# EAGLE board source_eagle (EAGLE 9.6.2)
REV: D
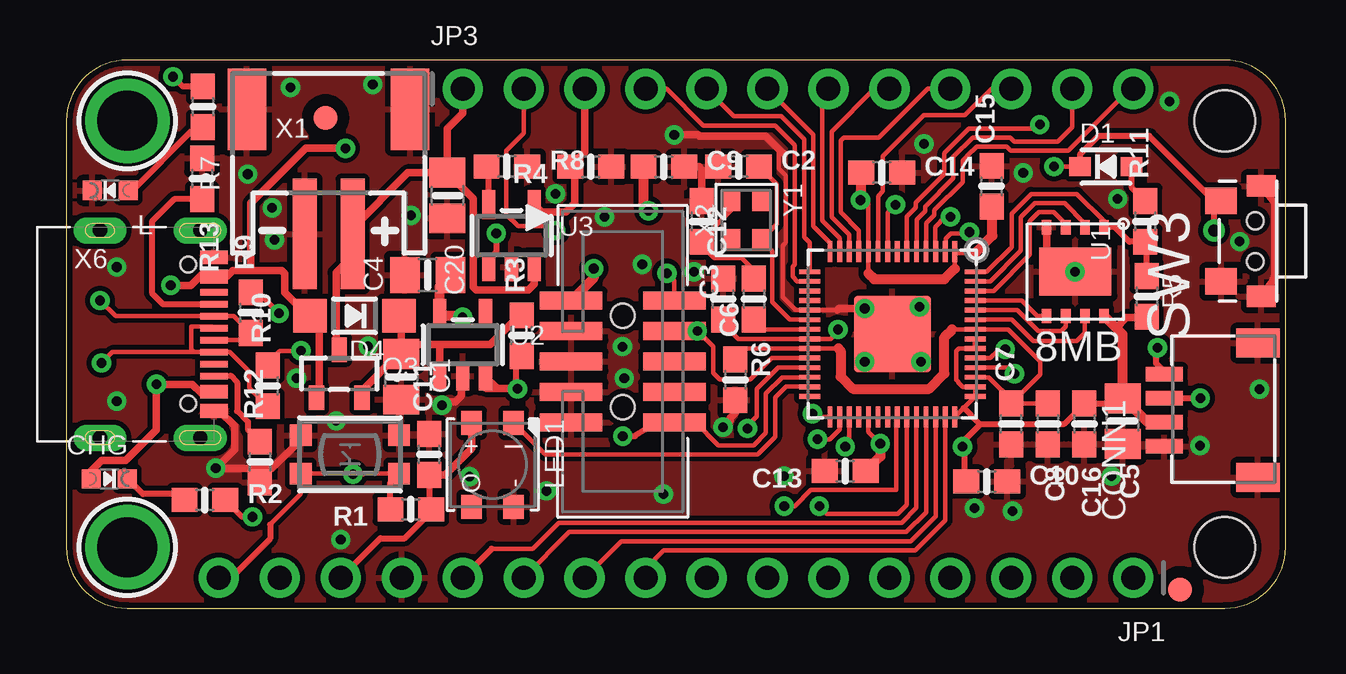
[diagram p0: board, top side]
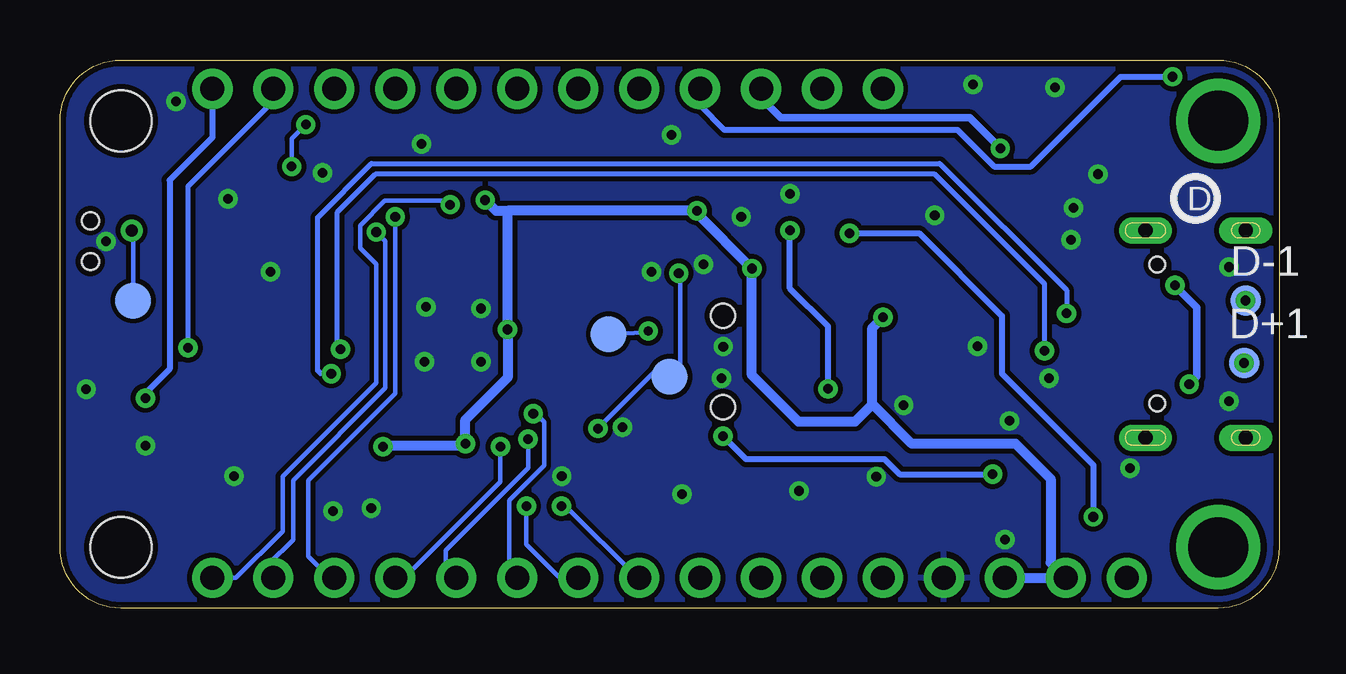
[diagram p1: board, bottom side, seen from below]

Size 50.8 x 22.86 mm. Coordinates in mm from the lower left corner, seen from the top.
Outline: 2.54,0 48.26,0 arc90 50.8,2.54 50.8,20.32 arc90 48.26,22.86 2.54,22.86 arc90 0,20.32 0,2.54 arc90 2.54,0
Copper layers (1*16): Top 0.035mm / dielectric 1.5mm / Bottom 0.035mm
Design rules "adafruit 7-7 *": minimum track width 7mil, minimum drill 15.5mil, track to track 8mil, track to pad 7mil, pad to pad 7mil, via to via 7mil, smd to smd 7mil, copper to edge 10mil, drill to drill 8mil, minimum pad ring 10mil, minimum via ring 8mil, stop-mask expansion 2mil, vias tented up to drill 20mil, thermal gap 10mil
Net classes: 1 power: width 0.305 mm; 2 gnd: width 0.254 mm
Holes 2.54 mm at 48.26,20.32 48.26,2.54

## Footprints (pad centres in the part's own frame; a part is rotated, then mirrored left to right if it is on the bottom)
0805-NO = smd 1.24 x 1.5: 1 -0.95,0; 2 0.95,0
0603-NO = smd 1.075 x 1: 1 -0.85,0; 2 0.85,0
CHIPLED_0603_NOOUTLINE = smd 0.8 x 0.8: A 0,-0.75; C 0,0.75
JST_SH4 = smd 0.6 x 1.55: 1 -1.5,2.006; 2 -0.5,2.006; 3 0.5,2.006; 4 1.5,2.006 | smd 1.2 x 1.8: MT1 -2.8,-1.894; MT2 2.8,-1.894
SOD-323_MINI = smd 0.9 x 0.8: A 1.07,0; C -1.07,0
SOD-123 = smd 1.4 x 1.4: A 1.85,0; C -1.85,0
B1,27 = smd 1.27 x 1.27: TP 0,0
QFN56_7MM_REDUCEDEPAD = smd 0.875 x 0.2: 1 -3.45,2.6; 2 -3.45,2.2; 3 -3.45,1.8; 4 -3.45,1.4; 5 -3.45,1; 6 -3.45,0.6; 7 -3.45,0.2; 8 -3.45,-0.2; 9 -3.45,-0.6; 10 -3.45,-1; 11 -3.45,-1.4; 12 -3.45,-1.8; 13 -3.45,-2.2; 14 -3.45,-2.6; 29 3.45,-2.6; 30 3.45,-2.2; 31 3.45,-1.8; 32 3.45,-1.4; 33 3.45,-1; 34 3.45,-0.6; 35 3.45,-0.2; 36 3.45,0.2; 37 3.45,0.6; 38 3.45,1; 39 3.45,1.4; 40 3.45,1.8; 41 3.45,2.2; 42 3.45,2.6 | smd 0.2 x 0.875: 15 -2.6,-3.45; 16 -2.2,-3.45; 17 -1.8,-3.45; 18 -1.4,-3.45; 19 -1,-3.45; 20 -0.6,-3.45; 21 -0.2,-3.45; 22 0.2,-3.45; 23 0.6,-3.45; 24 1,-3.45; 25 1.4,-3.45; 26 1.8,-3.45; 27 2.2,-3.45; 28 2.6,-3.45; 43 2.6,3.45; 44 2.2,3.45; 45 1.8,3.45; 46 1.4,3.45; 47 1,3.45; 48 0.6,3.45; 49 0.2,3.45; 50 -0.2,3.45; 51 -0.6,3.45; 52 -1,3.45; 53 -1.4,3.45; 54 -1.8,3.45; 55 -2.2,3.45; 56 -2.6,3.45 | smd 3.2 x 3.2: P$1 0,0
1X16_ROUND = drill 1 pad 1.676: 1 -19.05,0; 2 -16.51,0; 3 -13.97,0; 4 -11.43,0; 5 -8.89,0; 6 -6.35,0; 7 -3.81,0; 8 -1.27,0; 9 1.27,0; 10 3.81,0; 11 6.35,0; 12 8.89,0; 13 11.43,0; 14 13.97,0; 15 16.51,0; 16 19.05,0
1X12_ROUND = drill 1 pad 1.676: 1 -13.97,0; 2 -11.43,0; 3 -8.89,0; 4 -6.35,0; 5 -3.81,0; 6 -1.27,0; 7 1.27,0; 8 3.81,0; 9 6.35,0; 10 8.89,0; 11 11.43,0; 12 13.97,0
LED3535 = smd 1 x 0.85: 1 -1.75,0.875; 2 -1.75,-0.875; 3 1.75,-0.875; 4 1.75,0.875
SOT23-R = smd 0.635 x 1.016: 1 -0.95,-1; 2 0.95,-1; 3 0,1
BTN_KMR2_4.6X2.8 = smd 0.9 x 0.9: A 2.05,0.8; A' -2.05,0.8; B 2.05,-0.8; B' -2.05,-0.8
SPST_TACTILE_RA_2*4*3.5MM = smd 1.1 x 1.3: 1 -1.675,1.042; 2 1.675,1.042 | smd 0.9 x 1.2: MT1 -2.3,-0.635; MT2 2.3,-0.635 | hole 0.7: -0.85,-0.381; 0.85,-0.381
TESTPOINT_ROUND_1.5MM_NO = smd 1.5 x 1.5: P$1 0,0
USON8_4X4 = smd 0.6 x 0.4: 1 -1.85,1.2; 2 -1.85,0.4; 3 -1.85,-0.4; 4 -1.85,-1.2; 5 1.85,-1.2; 6 1.85,-0.4; 7 1.85,0.4; 8 1.85,1.2 | smd 2 x 3: PAD 0,0
SOT23-5 = smd 0.55 x 1.2: 1 -0.95,-1.3; 2 0,-1.3; 3 0.95,-1.3; 4 0.95,1.3; 5 -0.95,1.3
MOUNTINGHOLE_2.5_PLATED = drill 2.5 pad 3.2: P$1 0,0
FIDUCIAL_1MM = smd 1 x 1: 1 0,0
JSTPH2_BATT = smd 1 x 4.6: 1 -1,-2.049; 2 1,-2.049 | smd 1.6 x 3.4: NC1 -3.4,3.151; NC2 3.4,3.151
2X05_1.27MM_BOX_NOCREAM = smd 0.76 x 2.6: 1 -2.54,-2.15; 2 -2.54,2.15; 3 -1.27,-2.15; 4 -1.27,2.15; 5 0,-2.15; 6 0,2.15; 7 1.27,-2.15; 8 1.27,2.15; 9 2.54,-2.15; 10 2.54,2.15 | hole 1: -1.905,0; 1.905,0
USB_C_CUSB31-CFM2AX-01-X = smd 0.575 x 1.15: A1B12 -3.2,2.275; A4B9 -2.4,2.275; B1A12 3.2,2.275; B4A9 2.4,2.275 | smd 0.275 x 1.15: A5 -1.25,2.275; A6 -0.25,2.275; A7 0.25,2.275; A8 1.25,2.275; B5 1.75,2.275; B6 0.75,2.275; B7 -0.75,2.275; B8 -1.75,2.275 | drill 0.6 pad 1 long: M1 -4.32,1.7; M2 4.32,1.7; M3 -4.32,-2.48; M4 4.32,-2.48 | hole 0.65: 2.89,1.2; -2.89,1.2
CRYSTAL_2.5X2 = smd 0.9 x 0.75: 1 -0.825,-0.625; 2 0.825,-0.625; 3 0.825,0.625; 4 -0.825,0.625

## Placement (x,y rotation side)
C1  10uF  [0805-NO]  13.95,9.65 270 top
C2  22pF  [0603-NO]  28,18.41 0 top
C3  22pF  [0603-NO]  26.48,16.13 270 top
C4  10uF  [0805-NO]  15.05,13.89 180 top
C5  10uF  [0805-NO]  44.01,7.8 270 top
C6  0.1uF  [0603-NO]  27.88,9.53 90 top
C7  0.1uF  [0603-NO]  39.37,7.68 90 top
C8  1uF  [0603-NO]  40.89,7.68 270 top
C9  0.1uF  [0603-NO]  24.89,18.4 0 top
C10  1uF  [0603-NO]  38.35,5.28 0 top
C11  0.1uF  [0603-NO]  15.11,6.41 90 top
C12  0.1uF  [0603-NO]  27.37,12.89 90 top
C13  0.1uF  [0603-NO]  32.45,5.71 180 top
C14  0.1uF  [0603-NO]  33.97,18.16 0 top
C15  0.1uF  [0603-NO]  38.54,17.59 90 top
C16  0.1uF  [0603-NO]  42.42,7.68 270 top
C20  10uF  [0805-NO]  15.88,17.21 270 top
CHG  ORANGE  [CHIPLED_0603_NOOUTLINE]  1.78,5.4 270 top
CONN1  STEMMA_I2C_QT  [JST_SH4]  47.75,8.26 90 top
D1  NSR0320  [SOD-323_MINI]  43.31,18.41 0 top
D4  MBR0540  [SOD-123]  12,12.19 180 top
D+1  TPB1,27  [B1,27]  1.46,10.22 0 bottom
D-1  TPB1,27  [B1,27]  1.4,12.83 0 bottom
IC1  RP2040_QFN56  [QFN56_7MM_REDUCEDEPAD]  34.42,11.43 270 top
JP1  [1X16_ROUND]  25.4,1.27 180 top
JP3  [1X12_ROUND]  30.48,21.65 0 top
L  RED  [CHIPLED_0603_NOOUTLINE]  1.82,17.42 90 top
LED1  WS2812B3535  [LED3535]  17.75,5.98 270 top
Q3  DMG3415  [SOT23-R]  11.37,9.78 0 top
R1  10K  [0603-NO]  14.35,4.13 180 top
R2  10K  [0603-NO]  5.77,4.51 0 top
R3  10K  [0603-NO]  18.96,11.37 90 top
R4  10K  [0603-NO]  21.84,18.41 180 top
R5  10K  [0603-NO]  45.01,13 270 top
R6  1K  [0603-NO]  28.64,12.89 270 top
R7  10K  [0603-NO]  5.69,20.9 270 top
R8  5.1K  [0603-NO]  18.35,18.41 0 top
R9  27  [0603-NO]  7.68,12.32 90 top
R10  27  [0603-NO]  8.38,9.27 90 top
R11  1K  [0603-NO]  44.96,16.13 90 top
R12  5.1K  [0603-NO]  8.06,6.1 90 top
R13  5.1K  [0603-NO]  5.65,17.91 270 top
SW1  KMR2  [BTN_KMR2_4.6X2.8]  11.81,6.41 180 top
SW3  Mini RA Switch  [SPST_TACTILE_RA_2*4*3.5MM]  49.15,15.3 90 top
TP1  [TESTPOINT_ROUND_1.5MM_NO]  25.4,9.65 0 bottom
TP2  [TESTPOINT_ROUND_1.5MM_NO]  27.94,11.43 0 bottom
TP3  [TESTPOINT_ROUND_1.5MM_NO]  47.75,12.83 0 bottom
U1  W25Q64JVSSIQ  [USON8_4X4]  42.04,14.03 270 top
U2  RT9080/AP2112-3.3  [SOT23-5]  16.51,10.99 0 top
U3  MCP73831T-2ACI/OT  [SOT23-5]  18.54,15.53 0 top
U$1  [RP2040_BOT]  50.8,0 0 bottom
U$13  [PCBFEAT-REV-040]  3.49,17.08 0 bottom
U$31  MOUNTINGHOLE2.5  [MOUNTINGHOLE_2.5_PLATED]  2.54,20.32 270 top
U$32  MOUNTINGHOLE2.5  [MOUNTINGHOLE_2.5_PLATED]  2.54,2.54 270 top
U$34  FIDUCIAL_1MM  [FIDUCIAL_1MM]  10.79,20.45 270 top
U$35  FIDUCIAL_1MM  [FIDUCIAL_1MM]  46.4,0.77 270 top
U$43  [RP2040_TOP]  0,0 0 top
X1  JSTPH  [JSTPH2_BATT]  10.92,17.65 0 top
X2  2x5 SWD  [2X05_1.27MM_BOX_NOCREAM]  23.18,10.29 270 top
X6  USB Type C  [USB_C_CUSB31-CFM2AX-01-X]  3.87,11.43 270 top
Y1  12MHz/12pF  [CRYSTAL_2.5X2]  28.32,16.19 270 top

## Library data of the parts
C1-C3 C5-C16 C20 D1 D4 JP1 JP3 R1-R13 TP1-TP3 U1 Y1 = microbuilder
C4 = microbuilder; COMPANY: ADAFRUIT INDUSTRIES; DRAWN: KTOWN; REV: D
CHG L Q3 = microbuilder; ROT: 270
CONN1 = adafruit_electromech; LCSC: C2845363
D+1 D-1 = testpad
IC1 = adafruit_micro; LCSC: C2040
LED1 = microbuilder; LCSC: C5183448
SW1 SW3 X2 = adafruit_electromech
U2 = adafruit_power; JLC_ROTATION: 0
U3 = microbuilder; JLC_ROTATION: 270; LCSC: C424093
U$1 U$43 = feather_silks
U$13 = microbuilder; REV: D
U$31 U$32 = adafruit_electromech; BOM: EXCLUDE
U$34 U$35 = microbuilder; BOM: EXCLUDE
X1 = adafruit_electromech; LCSC: C47647
X6 = adafruit_electromech; LCSC: C165948

## Nets
1.2V: C6.2 C7.2 C8.1 IC1.23 IC1.45 IC1.50
!RESET: IC1.26 JP1.16 R1.2 SW1.A SW1.A' X2.10
+3V3: C4.1 C5.1 C9.1 C10.1 C11.1 C12.1 C13.1 C14.1 C15.1 C16.1 CONN1.2 IC1.1 IC1.10 IC1.22 IC1.33 IC1.42 IC1.43 IC1.44 IC1.48 IC1.49 JP1.14 JP1.15 LED1.2 R1.1 R5.2 U1.8 U2.5 X2.1
A0: IC1.38 JP1.12
A1: IC1.39 JP1.11
A2: IC1.40 JP1.10
A3: IC1.41 JP1.9
CC1: R13.2 X6.A5
CC2: R12.2 X6.B5
D4: IC1.8 JP1.1
D5: IC1.9 JP3.10
D6: IC1.11 JP3.9
D9: IC1.12 JP3.8
D10: IC1.13 JP3.7
D11: IC1.14 JP3.6
D12: IC1.15 JP3.5
D13: IC1.16 JP3.4 R7.1
D24: IC1.36 JP1.8
D25: IC1.37 JP1.7
D+: IC1.47 R10.2
D-: IC1.46 R9.2
EN: JP3.2 R3.1 U2.3
GND [power]: C1.2 C2.1 C3.1 C4.2 C5.2 C6.1 C7.1 C8.2 C9.2 C10.2 C11.2 C12.2 C13.2 C14.2 C15.2 C16.2 C20.2 CONN1.1 CONN1.MT1 CONN1.MT2 IC1.19 IC1.P$1 JP1.13 L.C LED1.4 R4.1 R8.2 R12.1 R13.1 SW1.B SW1.B' SW3.1 SW3.MT1 SW3.MT2 U1.4 U1.PAD U2.2 U3.2 X1.1 X1.NC1 X1.NC2 X2.3 X2.5 X2.7 X2.9 X6.A1B12 X6.B1A12
MISO: IC1.31 JP1.4
MOSI: IC1.30 JP1.5
N$1: CHG.C R2.1
N$2: L.A R7.2
N$3: R2.2 U3.1
N$4: R8.1 U3.5
N$5: C2.2 IC1.20 Y1.3
N$6: C3.2 R6.1 Y1.1
N$7: IC1.21 R6.2
N$8: D1.A R11.2
NEOPIX: IC1.27 LED1.1
QSPI_CS: IC1.56 R5.1 R11.1 U1.1
QSPI_DATA[0]: IC1.53 U1.5
QSPI_DATA[1]: IC1.55 U1.2
QSPI_DATA[2]: IC1.54 U1.3
QSPI_DATA[3]: IC1.51 U1.7
QSPI_SCK: IC1.52 U1.6
RX: IC1.3 JP1.3
SCK: IC1.29 JP1.6
SCL: CONN1.4 IC1.5 JP3.11
SDA: CONN1.3 IC1.4 JP3.12
SWCLK: IC1.24 TP2.P$1 X2.4
SWDIO: IC1.25 TP1.P$1 X2.2
TX: IC1.2 JP1.2
USB_D+: D+1.TP R10.1 X6.A6 X6.B6
USB_D-: D-1.TP R9.1 X6.A7 X6.B7
USBBOOT: D1.C IC1.6 SW3.2 TP3.P$1
VBAT [power]: C20.1 JP3.1 Q3.3 U3.3 X1.2
VBUS [power]: CHG.A D4.A JP3.3 Q3.1 R4.2 U3.4 X6.A4B9 X6.B4A9
VHI [power]: C1.1 D4.C Q3.2 R3.2 U2.1

## Tracks (layer width: path | path; a pad name or v marks a point on that pad's centre or on a via)
1.2V
  Top 0.178: 36.9,11.63 IC1.50 39.23,11.63 40.58,10.29 40.58,9.74 39.45,8.62 | 32.16,10.83 IC1.23 28.33,10.83 C6.2 | 39.45,8.62 C7.2 C8.1 | IC1.45 38.44,9.63 39.45,8.62
  Top 0.406: 36.9,11.63 36.58,11.3 36.58,9.78 35.94,9.14 32.77,9.14 32.26,9.65 32.26,10.73 32.16,10.83
!RESET  (via drill 0.4)
  Top 0.178: 12.38,5.61 SW1.A 9.76,4.77 8.48,3.49 | 12.38,5.61 SW1.A' | v11.94,5.59 12.36,5.59 12.38,5.61 | X2.10 26.23,7.75 26.69,7.29 26.69,7.27 27.16,6.79 28.64,6.79 29.15,7.3 29.15,8.95 29.82,9.63 IC1.26
  Top 0.254: JP1.16 6.86,1.27 8.48,2.9 8.48,3.49 | v23.18,7.18 23.68,7.18 24.64,7.77 24.69,7.75 X2.10 | R1.2 13.5,5.25 SW1.A'
  Bottom 0.254: v11.94,5.59 15.81,5.59 16.45,6.22 22.23,6.22 v23.18,7.18
+3V3  (via drill 0.4)
  Top 0.178: IC1.42 37.38,8.34 IC1.43 IC1.44 37.35,9.23 37.16,9.42 37.16,9.45 37.08,9.53 37.08,10.73 37.18,10.83 IC1.48 | IC1.33 33.42,7.35 v33.91,6.86 | 33.42,13.95 IC1.10 33.42,17.02 v33.08,17.02 | 37.02,14.16 IC1.1 37.08,14.82 37.87,14.82 | v32.15,11.62 32.15,11.53 31.86,11.23 IC1.22 27.99,11.23 27.37,11.85 C12.1 | 38.58,16.46 38.54,16.42 C15.1
  Top 0.203: IC1.48 IC1.49
  Top 0.254: JP1.14 13.08,2.92 14.1,2.92 15.2,4.03 R1.1 15.11,4.21 C11.1 | 38.03,7.69 38.07,7.65 37.47,7.05 37.47,6.86 v37.34,6.73 37.4,6.67 37.4,5.5 C10.1 | 38.03,7.69 37.38,8.34 | 38.03,7.69 41.58,7.69 C16.1 43.79,8.53 C5.1
  Top 0.305: U2.5 15.65,12.19 | 16.45,12.19 v16.51,12.13 | 15.56,13.45 C4.1 | 24.04,16.79 v24.26,16.57 | LED1.2 16.88,6.66 15.79,5.56 C11.1 | 44.97,12.12 44.17,12.12 43.74,11.68
  Top 0.406: 16.45,12.19 15.65,12.19 | 33.42,13.95 33.66,13.72 36.58,13.72 37.02,14.16 | v33.08,17.02 33.12,17.06 C14.1 | v21.97,14.16 21.97,13.77 X2.1 | 37.87,14.82 38.58,15.53 38.58,16.46 | v33.91,6.86 33.91,6.33 C13.1 | CONN1.2 45.06,7.75 44.07,8.75 C5.1 44.01,11.41 43.74,11.68 U1.8 | U2.5 15.56,13.45 | C9.1 24.04,16.79 | R5.2 44.97,12.12
  Bottom 0.178: 33.91,6.79 v33.91,6.86
  Bottom 0.305: 16.95,8.49 16.95,8.51
  Bottom 0.406: v16.51,12.13 16.95,11.68 16.95,8.51 15.3,6.86 10.99,6.86 9.53,5.4 9.53,1.91 JP1.15 JP1.14 | v37.34,6.73 37.27,6.79 33.91,6.79 | 32.15,16.57 v32.15,11.62 32.15,9.61 33.91,7.86 v33.91,6.86 | v33.08,17.02 32.64,16.57 32.15,16.57 | 32.15,16.57 v24.26,16.57 24.26,16.45 v21.97,14.16 21.97,9.72 20.03,7.78 17.67,7.78 16.95,8.49
A0
  Top 0.178: IC1.38 35.42,4.17 34.8,3.56 20.51,3.56 19.43,2.48 17.72,2.48
  Top 0.254: 17.72,2.48 JP1.12
A1
  Top 0.178: JP1.11 20.95,3.17 34.99,3.17 35.82,4 IC1.39
A2
  Top 0.178: IC1.40 36.22,3.83 35.18,2.79 23.11,2.79 JP1.10
A3
  Top 0.178: IC1.41 36.62,3.66 35.37,2.41 24.89,2.41 24.13,1.65 JP1.9
CC1
  Top 0.254: R13.2 4.48,17.06 3.56,16.13 3.56,13.14 4.02,12.68 X6.A5
CC2
  Top 0.254: X6.B5 6.84,9.7 7.11,9.42 7.11,8.22 7.56,7.77 7.56,7.45 R12.2
D4  (via drill 0.39)
  Top 0.178: IC1.8 34.22,16.5 v34.54,16.83
  Bottom 0.178: v34.54,16.83 34.71,16.99 37.26,16.99 38.29,15.96 38.29,15.03 37.62,14.36 37.62,9.4 41.53,5.49 41.53,3.21 43.47,1.27 JP1.1
D5
  Top 0.178: JP3.10 38.54,21.65 37.44,20.55 35.73,20.55 34.02,18.84 34.02,17.39 33.82,17.18 IC1.9
D6
  Top 0.178: JP3.9 35.88,21.65 33.85,19.62 32.38,19.62 32.26,19.5 32.26,16.51 33.02,15.75 IC1.11
D9
  Top 0.178: JP3.8 33.66,21.65 31.88,19.88 31.88,16.32 32.62,15.58 IC1.12
D10
  Top 0.178: IC1.13 32.22,15.44 31.5,16.16 31.5,21.4 JP3.7
D11
  Top 0.178: JP3.6 31.12,19.75 31.12,15.93 31.82,15.23 IC1.14
D12
  Top 0.178: JP3.5 27.81,20.51 29.79,20.51 30.74,19.56 30.74,15.47 30.97,15.24 IC1.15
D13  (via drill 0.4)
  Top 0.178: JP3.4 25.02,21.65 26.54,20.13 29.53,20.13 30.35,19.31 30.35,14.33 30.26,14.24 30.26,13.82 30.45,13.63 IC1.16
  Top 0.254: R7.1 4.85,21.75 v4.45,22.16
  Bottom 0.254: v4.45,22.16 6.6,22.16 10.35,18.41 11.87,18.41 13.4,19.94 23.11,19.94 24.13,20.95 JP3.4
D24  (via drill 0.4)
  Top 0.178: IC1.36 34.58,7.95 34.58,4.92 31.02,4.92 30.35,4.25 v29.91,4.25
  Bottom 0.178: v29.91,4.25 29.72,4.25 26.73,1.27 JP1.8
D25  (via drill 0.4)
  Top 0.178: IC1.37 35.02,4.31 34.64,3.94 31.69,3.94 v31.37,4.25
  Bottom 0.178: JP1.7 29.97,1.27 31.37,2.67 31.37,4 v31.37,4.25
D+  (via drill 0.4)
  Top 0.178: v9.78,10.73 8.89,10.73 8.38,10.22 R10.2 | IC1.47 38.5,10.43 38.8,10.73 39.05,10.73 v39.12,10.79
  Bottom 0.203: v39.12,10.79 39.18,10.79 39.24,10.86 39.24,16.51 37.66,18.1 14.35,18.1 9.78,13.53 v9.78,10.73
D-  (via drill 0.4)
  Top 0.178: v39.5,9.78 39.25,10.03 IC1.46
  Top 0.203: v8.86,12.29 7.98,13.17 R9.2
  Bottom 0.203: v39.5,9.78 39.94,9.78 40.07,9.91 40.07,16.3 37.82,18.54 14.14,18.54 8.86,13.26 v8.86,12.29
EN  (via drill 0.4)
  Top 0.178: JP3.2 19.05,19.8 18.33,19.09 18.33,16.42 18.82,15.94 20.19,15.94 v20.38,15.75
  Top 0.254: R3.1 18.73,10.29 18.73,9.18 17.96,9.18 U2.3 17.46,9.14 v18.8,9.14
  Bottom 0.254: v18.8,9.14 18.8,11.75 20.38,13.34 v20.38,15.75
GND  (via drill 0.39, 0.4)
  Top 0.178: 32.11,12.43 IC1.19 30.39,12.43 29.84,12.98 29.84,15.11 29.97,15.24 29.97,18.03 29.69,18.32 29.69,19.14
  Top 0.305: U2.2 16.45,9.62 16.45,8.86 16.19,8.61 15.65,8.61 v15.65,8.47 | SW1.B 9.76,7.02 8.56,5.82 6.22,5.82 7.01,6.61 7.01,7.59 6.38,8.23 X6.B1A12 | 32.11,12.43 32.18,12.5 v33.26,12.5 34.33,11.43 IC1.P$1 | C6.1 27.88,8.15 27.65,7.92 27.65,7.84 v27.36,7.54 | C3.1 26.48,18.29 26.36,18.4 C9.2 | v25.32,19.74 26.31,19.74 26.36,19.68 29.15,19.68 29.69,19.14 29.91,18.92 | U1.4 40.84,14.41 41.22,14.02 v42.02,14.02 | SW3.MT2 50.35,16.89 50.35,13.83 | 50.35,13.88 50.26,13.63 SW3.MT1
  other vias: 11.24,7.81 23.24,9.59 14.35,16.38 8.57,16.7 6.22,5.84 9.33,21.72 12.76,21.84 12.57,10.92 7.56,18.1 16.79,5.49 8.67,15.35 26.15,14.02 23.99,14.34 23.16,10.91 24.88,4.75 35.55,12.56 35.61,10.27 33.26,10.27 35.74,19.35 37.83,4.18 49.71,9.13 47.23,6.78 43.55,5.51 22.42,16.32 20.38,17.27 45.96,21.13 9.59,9.59 2.1,8.64 2.1,14.22 20,4.89 11.43,2.86 48.88,15.29 39.42,4.05 29.9,5.51 39.87,18.15 43.8,17.07
  pour Top: 0,22.86 0,0 50.8,-0.06 50.8,22.86
  pour Bottom: 50.93,0 0,0 0,22.86 50.93,22.86
MISO  (via drill 0.4)
  Top 0.178: IC1.31 32.62,6.9 v32.45,6.73
  Bottom 0.178: v32.45,6.73 32.45,5.27 36.45,1.27 JP1.4
MOSI  (via drill 0.4)
  Top 0.178: IC1.30 32.22,7.46 31.81,7.05 v31.3,7.05
  Bottom 0.178: v31.3,7.05 31.3,5.85 34.73,2.41 34.73,1.52 34.48,1.27 JP1.5
N$1
  Top 0.254: R2.1 4.66,4.76 3.18,4.76 2.54,5.4 CHG.C
N$2
  Top 0.254: R7.2 5.52,19.89 5.2,19.89 2.74,17.42 L.A
N$3  (via drill 0.4)
  Top 0.254: v7.75,3.81 7.31,3.81 R2.2 | v17.91,15.63 17.91,14.84 17.59,14.53 U3.1
  Bottom 0.254: v7.75,3.81 7.75,5.97 11.56,9.78 11.56,12.19 15,15.63 v17.91,15.63
N$4
  Top 0.254: R8.1 17.57,18.35 17.57,16.86 U3.5
N$5
  Top 0.178: C2.2 29.59,17.68 29.59,16.01 Y1.3 29.41,14.9 29.41,12.76 30.14,12.03 IC1.20
N$6
  Top 0.178: Y1.1 27.7,16.59 26.48,15.37 C3.2 26.48,15.13 27,14.61 28.13,14.61 28.64,14.1 R6.1
N$7
  Top 0.178: IC1.21 29.05,11.63 R6.2
N$8
  Top 0.254: D1.A 44.38,17.56 R11.2
NEOPIX
  Top 0.178: LED1.1 19.95,6.41 28.8,6.41 29.53,7.14 29.53,8.79 29.98,9.25 30.95,9.25 IC1.27
QSPI_CS
  Top 0.178: IC1.56 38.35,14.03 39.38,15.06 39.38,16.46 40.2,17.27 42.1,17.27 43.24,16.14 U1.1
  Top 0.254: R5.1 45.01,15.28 R11.1 44.28,15.28 43.68,15.88 U1.1
QSPI_DATA[0]
  Top 0.178: U1.5 40.46,12.18 39.81,12.83 IC1.53
QSPI_DATA[1]
  Top 0.178: U1.2 42.44,16.05 41.59,16.89 40.35,16.89 39.76,16.3 39.76,14.9 38.49,13.63 IC1.55
QSPI_DATA[2]
  Top 0.178: IC1.54 38.63,13.23 40.15,14.74 40.15,16.14 40.51,16.51 41.15,16.51 41.64,16.02 U1.3
QSPI_DATA[3]
  Top 0.178: U1.7 42.44,11.48 42.09,11.14 40.28,11.14 39.39,12.03 IC1.51
QSPI_SCK
  Top 0.178: U1.6 41.64,11.74 41.45,11.55 40.49,11.55 39.61,12.43 IC1.52
RX  (via drill 0.4)
  Top 0.178: v36.83,16.32 36.62,16.32 36.2,15.89 36.2,14.9 IC1.3
  Bottom 0.178: JP1.3 39.56,1.27 40.45,2.16 40.45,5.33 36.83,8.95 v36.83,16.32
SCK  (via drill 0.4)
  Top 0.178: IC1.29 31.21,7.98 v31.08,8.11
  Bottom 0.178: v31.08,8.11 30.98,8.11 30.63,7.76 30.63,5.95 32.09,4.49 32.09,1.42 31.94,1.27 JP1.6
SCL  (via drill 0.4)
  Top 0.178: JP3.11 41.91,20.07 41.31,19.46 39.5,19.46 39.33,19.62 37.76,19.62 36.96,18.83 36.96,17.93 35.78,16.75 35.78,16.55 35.44,16.21 35.44,14.9 IC1.5
  Top 0.254: CONN1.4 45.72,9.9 45.41,10.21 45.4,10.79 v45.47,10.86
  Bottom 0.203: v45.47,10.86 45.47,17.59 41.91,21.14 JP3.11
SDA  (via drill 0.4)
  Top 0.178: IC1.4 35.82,16.05 36.16,16.4 36.16,16.6 37.34,17.77 37.34,18.67 37.72,19.05 37.74,19.05 37.93,19.24 39.18,19.24 39.34,19.08 41.75,19.08 44.32,21.65 JP3.12
  Top 0.254: v47.24,8.76 47.02,8.76 CONN1.3
  Bottom 0.254: JP3.12 44.45,19.62 46.23,17.84 46.23,9.97 47.24,8.95 v47.24,8.76
SWCLK  (via drill 0.39)
  Top 0.178: IC1.24 29.38,10.43 28.49,9.54 27.22,9.54 26.96,9.8 26.96,10.9 26.3,11.56 v26.29,11.56 X2.4
  Bottom 0.178: TP2.P$1 26.35,11.49 v26.29,11.56
SWDIO  (via drill 0.4)
  Top 0.178: X2.2 25.33,13.66 v25.02,13.97 | v28.38,7.49 28.38,7.62 28.77,8 28.77,9.14 29.65,10.03 IC1.25
  Bottom 0.178: v25.02,13.97 24.96,13.91 24.96,10.1 TP1.P$1 25.59,9.84 25.59,9.91 25.97,9.91 v28.38,7.49
TX  (via drill 0.4)
  Top 0.178: IC1.2 36.64,14.9 36.64,15.41 36.84,15.62 37.56,15.62 v37.62,15.68
  Bottom 0.178: v37.62,15.68 37.24,15.3 37.24,9.18 41.08,5.33 41.08,2.86 42.1,1.84 42.1,1.4 41.97,1.27 JP1.2
USB_D+  (via drill 0.4)
  Top 0.178: X6.A6 6.09,11.74 5.21,11.74 5.21,10.92 5.21,10.79 5.32,10.68 | 5.32,10.68 1.92,10.68 D+1.TP | R10.1 7.62,9.19 7.62,9.87 6.8,10.68 X6.B6 5.32,10.68
  other vias: 1.46,10.22
USB_D-  (via drill 0.4)
  Top 0.178: X6.A7 7.39,11.18 R9.1 6.97,12.18 X6.B7 2.04,12.18 D-1.TP
  other vias: 1.4,12.83
USBBOOT  (via drill 0.39, 0.5)
  Top 0.178: IC1.6 35.02,16.33 35.4,16.71 35.4,16.91 36.58,18.09 36.58,18.98 37.6,20.01 40.4,20.01 v40.56,20.16 | v41.15,18.41 D1.C
  Top 0.254: D1.C 42.24,18.92 43,19.68 45.12,19.68 47.82,16.98 SW3.2 47.82,16.8 v47.82,15.75
  Bottom 0.178: TP3.P$1 47.75,15.68 v47.82,15.75 | v40.56,20.16 41.15,19.57 v41.15,18.41
VBAT
  Top 0.305: Q3.3 11.24,10.91 11.24,13.99 11.92,14.67 X1.2 11.92,15.86 14.22,18.16 C20.1 | JP3.1 16.51,20.64 15.88,20 C20.1 | C20.1 16.95,17.08 16.95,15.5 16.95,13.4 17.08,13.27 19.24,13.27 19.49,13.52 U3.3
VBUS  (via drill 0.4)
  Top 0.305: Q3.1 10.54,8.91 10.54,11.7 10.15,12.09 D4.A 10.06,12.19 10.06,12.2 9.09,13.17 9.09,13.96 8.97,14.09 7.68,14.09 | v4.34,13.46 5.19,13.46 5.64,13.91 5.64,13.83 X6.A4B9 6.68,13.83 6.93,14.09 7.68,14.09 | X6.B4A9 6.06,8.95 5.64,8.95 5.25,9.34 v3.75,9.34 3.75,7.43 2.48,6.16 1.47,6.16 1.03,5.71 CHG.A | v11.62,19.18 9.97,19.18 7.68,16.89 7.68,14.09 | JP3.3 21.59,19.01 R4.2 21.18,18.22 21.18,16.89 20.81,16.52 19.81,16.52 U3.4
  Bottom 0.305: v4.34,13.46 3.43,12.55 3.43,9.65 v3.75,9.34 | JP3.3 21.59,21.27 20.77,20.45 12.89,20.45 v11.62,19.18
VHI
  Top 0.305: 15.56,10.99 17.65,10.99 18.88,12.22 R3.2 | U2.1 15.56,10.99 | C1.1 13.84,10.6 12.32,9.08 Q3.2 | C1.1 13.95,12.1 D4.C | 15.56,10.99 14.34,10.99 C1.1

## Text on the board
tPlace: 8MB